# EAGLE board Schéma physique (EAGLE 9.6.2)
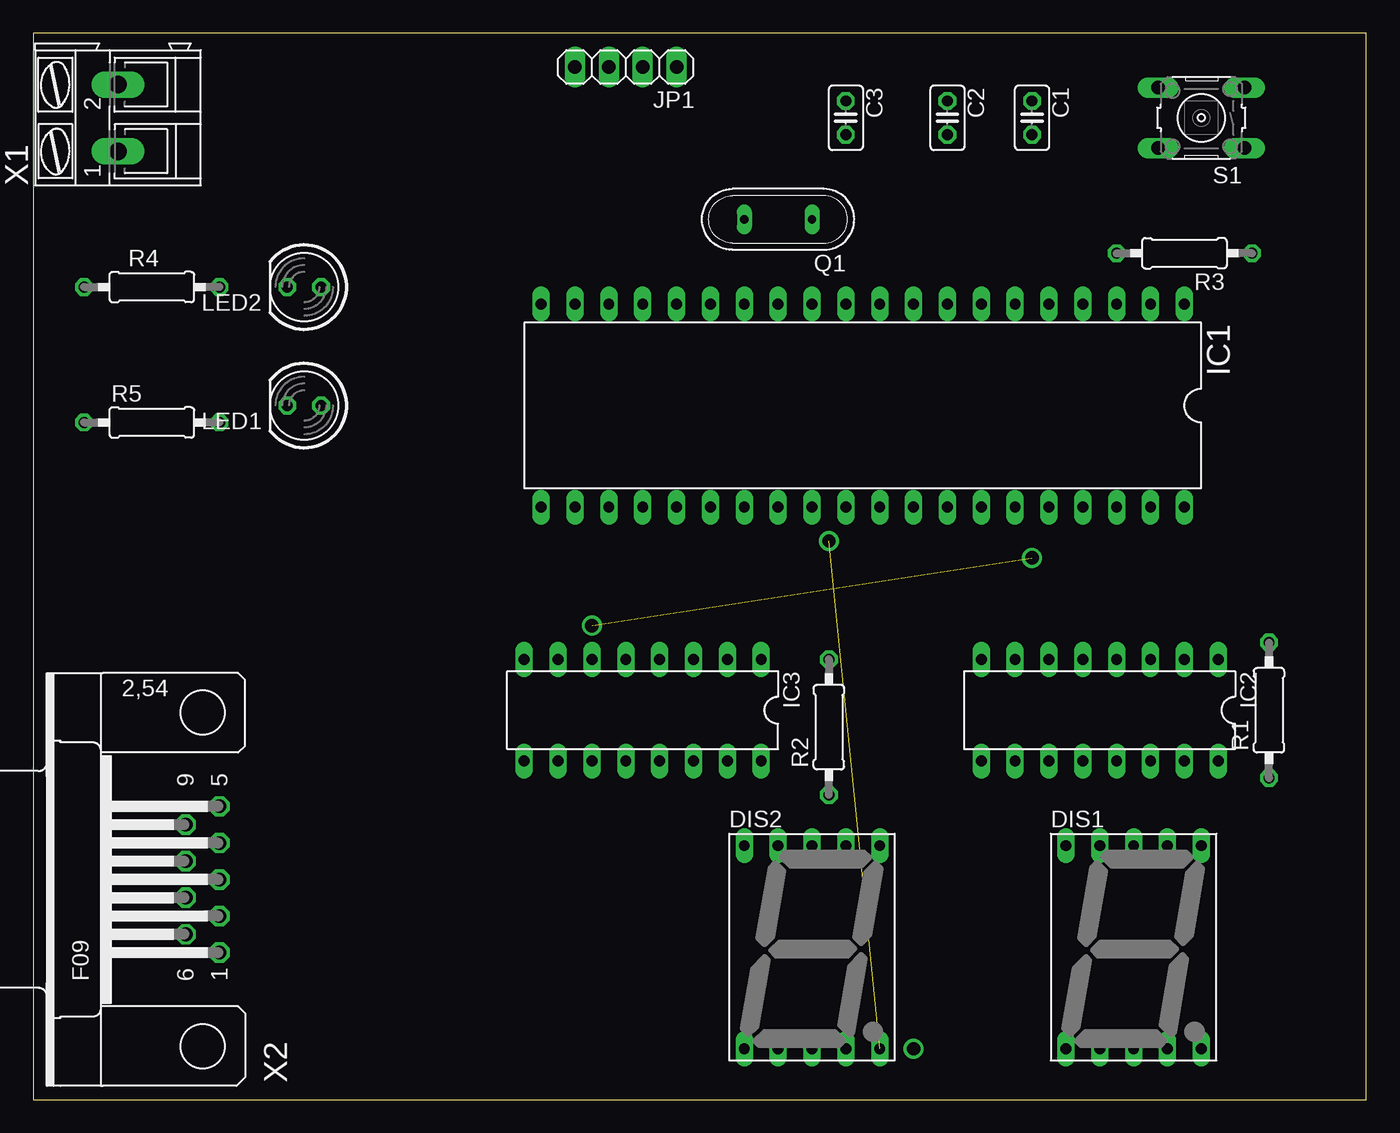
[diagram p0: board, top side]
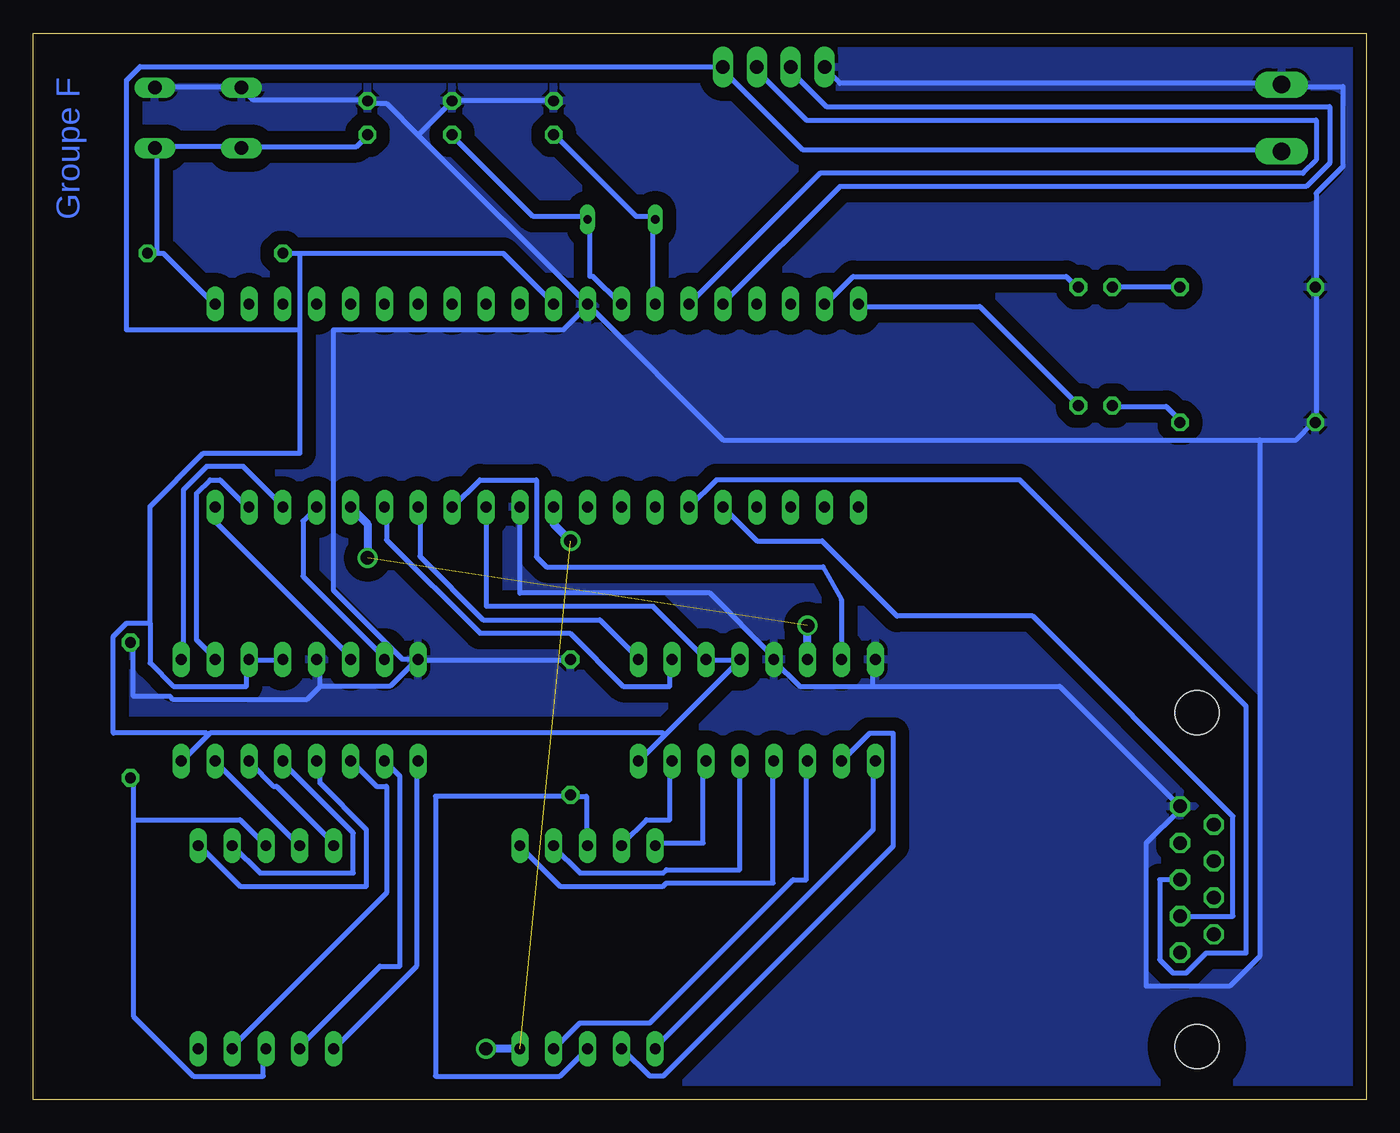
[diagram p1: board, bottom side, seen from below]

Size 100 x 80 mm. Coordinates in mm from the lower left corner, seen from the top.
Outline: 0,0 100,0 100,80 0,80 0,0
Copper layers (1*16): Top 0.035mm / dielectric 1.5mm / Bottom 0.035mm
Design rules "default *": minimum track width 15mil, minimum drill 0.35mm, track to track 15mil, track to pad 15mil, pad to pad 15mil, via to via 15mil, smd to smd 15mil, copper to edge 40mil, drill to drill 6mil, minimum pad ring 10mil, minimum via ring 8mil, stop-mask expansion 4mil, vias tented up to drill 0mil, thermal gap 10mil

## Footprints (pad centres in the part's own frame; a part is rotated, then mirrored left to right if it is on the bottom)
C025-025X050 = drill 0.813 octagon: 1 -1.27,0; 2 1.27,0
HDSP-M = drill 0.813 long: 1 -5.08,-7.62; 2 -2.54,-7.62; 3 0,-7.62; 4 2.54,-7.62; 5 5.08,-7.62; 6 5.08,7.62; 7 2.54,7.62; 8 0,7.62; 9 -2.54,7.62; 10 -5.08,7.62
DIL40 = drill 0.813 long: 1 -24.13,-7.62; 2 -21.59,-7.62; 3 -19.05,-7.62; 4 -16.51,-7.62; 5 -13.97,-7.62; 6 -11.43,-7.62; 7 -8.89,-7.62; 8 -6.35,-7.62; 9 -3.81,-7.62; 10 -1.27,-7.62; 11 1.27,-7.62; 12 3.81,-7.62; 13 6.35,-7.62; 14 8.89,-7.62; 15 11.43,-7.62; 16 13.97,-7.62; 17 16.51,-7.62; 18 19.05,-7.62; 19 21.59,-7.62; 20 24.13,-7.62; 21 24.13,7.62; 22 21.59,7.62; 23 19.05,7.62; 24 16.51,7.62; 25 13.97,7.62; 26 11.43,7.62; 27 8.89,7.62; 28 6.35,7.62; 29 3.81,7.62; 30 1.27,7.62; 31 -1.27,7.62; 32 -3.81,7.62; 33 -6.35,7.62; 34 -8.89,7.62; 35 -11.43,7.62; 36 -13.97,7.62; 37 -16.51,7.62; 38 -19.05,7.62; 39 -21.59,7.62; 40 -24.13,7.62
DIL16 = drill 0.813 long: 1 -8.89,-3.81; 2 -6.35,-3.81; 3 -3.81,-3.81; 4 -1.27,-3.81; 5 1.27,-3.81; 6 3.81,-3.81; 7 6.35,-3.81; 8 8.89,-3.81; 9 8.89,3.81; 10 6.35,3.81; 11 3.81,3.81; 12 1.27,3.81; 13 -1.27,3.81; 14 -3.81,3.81; 15 -6.35,3.81; 16 -8.89,3.81
1X04 = drill 1.016 long: 1 -3.81,0; 2 -1.27,0; 3 1.27,0; 4 3.81,0
LED5MM = drill 0.813 octagon: A -1.27,0; K 1.27,0
QS = drill 0.61 long: 1 -2.54,0; 2 2.54,0
0207/10 = drill 0.813 octagon: 1 -5.08,0; 2 5.08,0
B3F-10XX = drill 1.016 long: 1 -3.251,2.261; 2 3.251,2.261; 3 -3.251,-2.261; 4 3.251,-2.261
AK300/2 = drill 1.321 long: 1 -2.515,0; 2 2.489,0
F09H = drill 1.016 octagon: 1 -5.486,-1.27; 2 -2.743,-1.27; 3 0,-1.27; 4 2.743,-1.27; 5 5.486,-1.27; 6 -4.115,1.27; 7 -1.372,1.27; 8 1.372,1.27; 9 4.115,1.27 | hole 3.302: -12.522,0; 12.522,0

## Placement (x,y rotation side)
C1  [C025-025X050]  74.93,73.66 270 top
C2  [C025-025X050]  68.58,73.66 270 top
C3  [C025-025X050]  60.96,73.66 270 top
DIS1  HD-H103  [HDSP-M]  82.55,11.43 0 top
DIS2  HD-H103  [HDSP-M]  58.42,11.43 0 top
IC1  PIC16F877P  [DIL40]  62.23,52.07 180 top
IC2  [DIL16]  80.01,29.21 180 top
IC3  [DIL16]  45.72,29.21 180 top
JP1  [1X04]  44.45,77.47 180 top
LED1  [LED5MM]  20.32,52.07 180 top
LED2  [LED5MM]  20.32,60.96 180 top
Q1  [QS]  55.88,66.04 180 top
R1  [0207/10]  92.71,29.21 90 top
R2  [0207/10]  59.69,27.94 90 top
R3  [0207/10]  86.36,63.5 180 top
R4  [0207/10]  8.89,60.96 0 top
R5  [0207/10]  8.89,50.8 0 top
S1  [B3F-10XX]  87.63,73.66 180 top
X1  [AK300/2]  6.35,73.66 90 top
X2  [F09H]  12.7,16.51 90 top

## Library data of the parts
C1-C3 = rcl; SPICEPREFIX: C
DIS1 DIS2 = display-hp; OC_FARNELL: unknown; OC_NEWARK: unknown
IC1 = microchip; MF: MICROCHIP; MPN: PIC16F877-04/P; OC_FARNELL: 9761349; OC_NEWARK: 61K3463
IC2 IC3 = ic-package
JP1 = pinhead
LED1 LED2 = led
Q1 = special
R1-R5 = rcl; SPICEPREFIX: R
S1 = switch-omron; MPN: B3F-1000; OC_FARNELL: 176432; OC_NEWARK: 36M3542
X1 = con-ptr500; OC_FARNELL: unknown; OC_NEWARK: unknown
X2 = con-subd; OC_FARNELL: unknown; OC_NEWARK: unknown

## Nets
GND: C1.1 C2.1 C3.1 IC1.12 IC1.31 IC2.5 IC2.8 IC3.5 IC3.8 JP1.4 R1.2 R2.2 R4.1 R5.1 S1.3 S1.4 X1.2 X2.5
N$1: IC1.25 X2.2
N$2: IC1.26 X2.3
N$3: IC1.33 IC3.7
N$4: IC1.34 IC3.1
N$5: IC1.35 IC3.2
N$6: IC1.36 IC3.6
N$7: IC1.37 IC2.7
N$8: IC1.38 IC2.1
N$9: IC1.39 IC2.2
N$10: IC1.40 IC2.6
N$11: DIS1.7 IC2.13
N$12: DIS1.6 IC2.12
N$13: DIS1.4 IC2.11
N$14: DIS1.2 IC2.10
N$15: DIS1.1 IC2.9
N$16: DIS1.9 IC2.15
N$17: DIS1.10 IC2.14
N$18: DIS2.7 IC3.13
N$19: DIS2.6 IC3.12
N$20: DIS2.4 IC3.11
N$21: DIS2.2 IC3.10
N$22: DIS2.1 IC3.9
N$23: DIS2.9 IC3.15
N$24: DIS2.10 IC3.14
N$25: DIS1.3 DIS1.8 R1.1
N$26: DIS2.3 DIS2.8 R2.1
N$27: DIS2.5 IC1.30
N$28: C1.2 IC1.1 R3.1 S1.1 S1.2
N$29: C2.2 IC1.13 Q1.1
N$30: C3.2 IC1.14 Q1.2
N$31: IC1.15 JP1.2
N$32: IC1.16 JP1.3
N$35: IC1.19 LED2.A
N$36: IC1.20 LED1.A
N$37: LED2.K R4.2
N$38: LED1.K R5.2
VCC: IC1.11 IC1.32 IC2.3 IC2.4 IC2.16 IC3.3 IC3.4 IC3.16 JP1.1 R3.2 X1.1

## Tracks (layer width: path | path; a pad name or v marks a point on that pad's centre or on a via)
GND
  Bottom 0.381: 37,31 37,33 IC3.8 | 37,31 42.5,31 44.5,33 IC3.5 44.5,33.25 49.25,38 63.5,38 IC1.31 | 37,31 23,31 14,22 X2.5 14,21.75 16.5,19.25 16.5,8.5 10.25,8.5 8,10.75 8,49.5 | JP1.4 40.5,77.25 39.5,76.25 6.5,76.25 X1.2 6.25,76 1.75,76 1.75,70 3.75,68 3.75,61 R4.1 3.75,60.75 3.75,51 R5.1 4,50.75 5.25,49.5 8,49.5 | R2.2 59.75,33 71,33 IC2.8 | 78.5,31 78.5,33 IC2.5 | 78.5,31 73.25,31 71.25,33 IC2.8 | 78.5,31 79.5,30 89.5,30 89.75,30.25 92.5,30.25 92.5,34.25 R1.2 | S1.3 90.75,76 84.5,76 S1.4 84.25,75.75 83.5,75 75,75 C1.1 74.75,74.75 73.5,74.75 71.12,72.38 | C3.1 61,75 68.5,75 C2.1 68.75,74.75 71.12,72.38 | 71.12,72.38 58.5,59.75 IC1.12 | IC2.8 72.29,33.02 77.5,38.23 77.5,57.75 60.25,57.75 58.5,59.5 IC1.12 | 8,49.5 48.25,49.5 58.25,59.5 IC1.12
  pour Bottom (isolate 1.016): 0,80.01 100.33,80.01 100.33,0 0,0
N$1
  Bottom 0.381: IC1.25 45.72,41.91 40.83,41.91 35.19,36.27 25.02,36.27 10,21.25 10,13.75 13.75,13.75 X2.2
N$2
  Bottom 0.381: IC1.26 48.75,46.5 26,46.5 9,29.5 9,11 12,11 13.5,9.5 14.5,9.5 15.5,10.5 15.5,16.5 14,16.5 X2.3
N$3
  Bottom 0.381: IC3.7 39.37,37.51 40.75,39.96 61.5,39.96 62.25,40.71 62.25,46.5 66.5,46.5 68.5,44.5 IC1.33
N$4
  Bottom 0.381: IC3.1 54.75,33.25 57.5,36 66.25,36 71,40.75 71,44.25 IC1.34
N$5
  Bottom 0.381: IC3.2 52.25,33 52.25,31 55.75,31 59.75,35 66.5,35 73.5,42 73.5,44.25 IC1.35
N$6  (via drill 1 pad 1.3)  (1 unrouted)
  Bottom 0.61: IC3.6 v41.91,35.56 | IC1.36 74.93,43.18 v74.93,40.64
N$7
  Bottom 0.381: IC1.37 79.77,43.42 79.77,39.25 73.74,33.22 IC2.7
N$8
  Bottom 0.381: IC2.1 88.75,33.25 88.75,45.75 87,47.5 84.25,47.5 81.25,44.5 IC1.38
N$9
  Bottom 0.381: IC1.39 84,44.5 86,46.5 86.75,46.5 87.75,45.5 87.75,34.5 86.5,33.25 IC2.2
N$10
  Bottom 0.381: IC2.6 76.25,33.25 86.25,43.25 86.25,44.25 IC1.40
N$11
  Bottom 0.381: IC2.13 81.25,25.25 76,20 76,17 83,17 85,19 DIS1.7
N$12
  Bottom 0.381: IC2.12 78.5,25.25 78.5,23.75 75,20.25 75,16 84.5,16 87.5,19 DIS1.6
N$13
  Bottom 0.381: DIS1.4 85,4 73.5,15.5 73.5,23.5 74.25,23.5 76,25.25 IC2.11
N$14
  Bottom 0.381: IC2.10 73.5,25.25 72.5,24.25 72.5,10 74,10 80,4 DIS1.2
N$15
  Bottom 0.381: DIS1.1 77.25,4 71.25,10 71.25,25.25 IC2.9
N$16
  Bottom 0.381: DIS1.9 80.25,19.25 86.25,25.25 IC2.15
N$17
  Bottom 0.381: DIS1.10 77.5,19.25 81.75,23.5 82,23.5 83.75,25.25 IC2.14
N$18
  Bottom 0.381: IC3.13 47,25.25 47,17.25 52.5,17.25 52.75,17 59,17 61,19 DIS2.7
N$19
  Bottom 0.381: IC3.12 44.5,25.25 44.5,16.25 52.5,16.25 52.75,16 60.5,16 63.5,19 DIS2.6
N$20
  Bottom 0.381: IC3.11 42,25.25 42,16.5 43,16.5 53.75,5.75 59,5.75 60.75,4 DIS2.4
N$21
  Bottom 0.381: DIS2.2 55.75,3.75 53.75,1.75 52.75,1.75 35.5,19 35.5,27.5 37.25,27.5 39.25,25.5 IC3.10
N$22
  Bottom 0.381: DIS2.1 53.25,4 37,20.25 37,25.25 IC3.9
N$23
  Bottom 0.381: IC3.15 52.25,25.25 52.25,21 54,21 55.75,19.25 DIS2.9
N$24
  Bottom 0.381: IC3.14 49.75,25.25 49.75,19.25 53.25,19.25 DIS2.10
N$25
  Bottom 0.381: 92.5,21 92.5,24 R1.1 | 92.5,21 92.5,6.25 88,1.75 82.75,1.75 82.75,3.75 DIS1.3 | DIS1.8 84.5,21 92.5,21
N$26
  Bottom 0.381: DIS2.3 58.5,3.75 60.5,1.75 69.83,1.75 69.83,22.75 59.75,22.75 R2.1 59.5,22.75 58.5,22.75 58.5,19.25 DIS2.8
N$27  (via drill 1 pad 1.3)  (1 unrouted)
  Bottom 0.61: DIS2.5 v66.04,3.81 | IC1.30 60.96,43.18 v59.69,41.91
N$28
  Bottom 0.381: R3.1 90.75,63.5 | 90.75,63.5 90.25,63.5 86.5,59.75 IC1.1 | C1.2 75,72.25 75.75,71.5 84.25,71.5 S1.2 84.5,71.5 90.75,71.5 S1.1 90.75,71.25 90.75,63.5
N$29
  Bottom 0.381: IC1.13 56,59.75 58,61.75 58.25,61.75 58.25,66 Q1.1 58.5,66.25 62.5,66.25 68.5,72.25 C2.2
N$30
  Bottom 0.381: IC1.14 53.5,59.75 53.5,66 Q1.2 53.5,66.25 54.75,66.25 60.75,72.25 C3.2
N$31
  Bottom 0.381: IC1.15 50.75,59.75 41,69.5 4.75,69.5 3.75,70.5 3.75,73.5 42,73.5 45.75,77.25 JP1.2
N$32
  Bottom 0.381: IC1.16 48.25,59.75 39.5,68.5 4.5,68.5 2.75,70.25 2.75,74.5 40.5,74.5 43.25,77.25 JP1.3
N$35
  Bottom 0.381: LED2.A 21.75,61 22.5,61.75 38.5,61.75 40.5,59.75 IC1.19
N$36
  Bottom 0.381: LED1.A 21.75,52.25 29,59.5 38,59.5 IC1.20
N$37
  Bottom 0.381: R4.2 14,61 19,61 LED2.K
N$38
  Bottom 0.381: R5.2 14,51 15,52 19,52 LED1.K
VCC
  Bottom 0.381: X1.1 6.5,71.25 42.25,71.25 48.25,77.25 JP1.1 48.5,77.5 92,77.5 93,76.5 93,57.75 80,57.75 | R3.2 80,63.5 | 80,63.5 64.75,63.5 61,59.75 IC1.11 | IC2.4 81.5,33 83.75,33 IC2.3 84,33 84,31 89.5,31 91.25,32.75 91.25,35.75 | 47,33 49.5,33 IC3.3 49.75,33.25 53.5,37 66,37 66,44.25 IC1.32 | 47,33 52.62,27.38 | 52.62,27.38 54.5,25.5 IC3.16 | 47,33 IC3.4 | 86.88,27.38 86.75,27.5 52.75,27.5 52.62,27.38 | 86.88,27.38 88.75,25.5 IC2.16 | 91.25,35.75 93,35.75 94,34.75 94,27.5 87,27.5 86.88,27.38 | 80,57.75 80,48.5 87.25,48.5 91.25,44.5 91.25,35.75 | 80,57.75 80,63.5

## Text on the board
Bottom: Groupe F